# Altium PCB PowerManagement_Base.PcbDoc
Units mm, origin at the board's own origin, x right, y up, seen from the top; angles counter-clockwise.
Board outline 80.38 x 130.25 mm, 2 copper layers (Top Layer, Bottom Layer); 73 components, 72 nets, 280 pads, 42 vias.
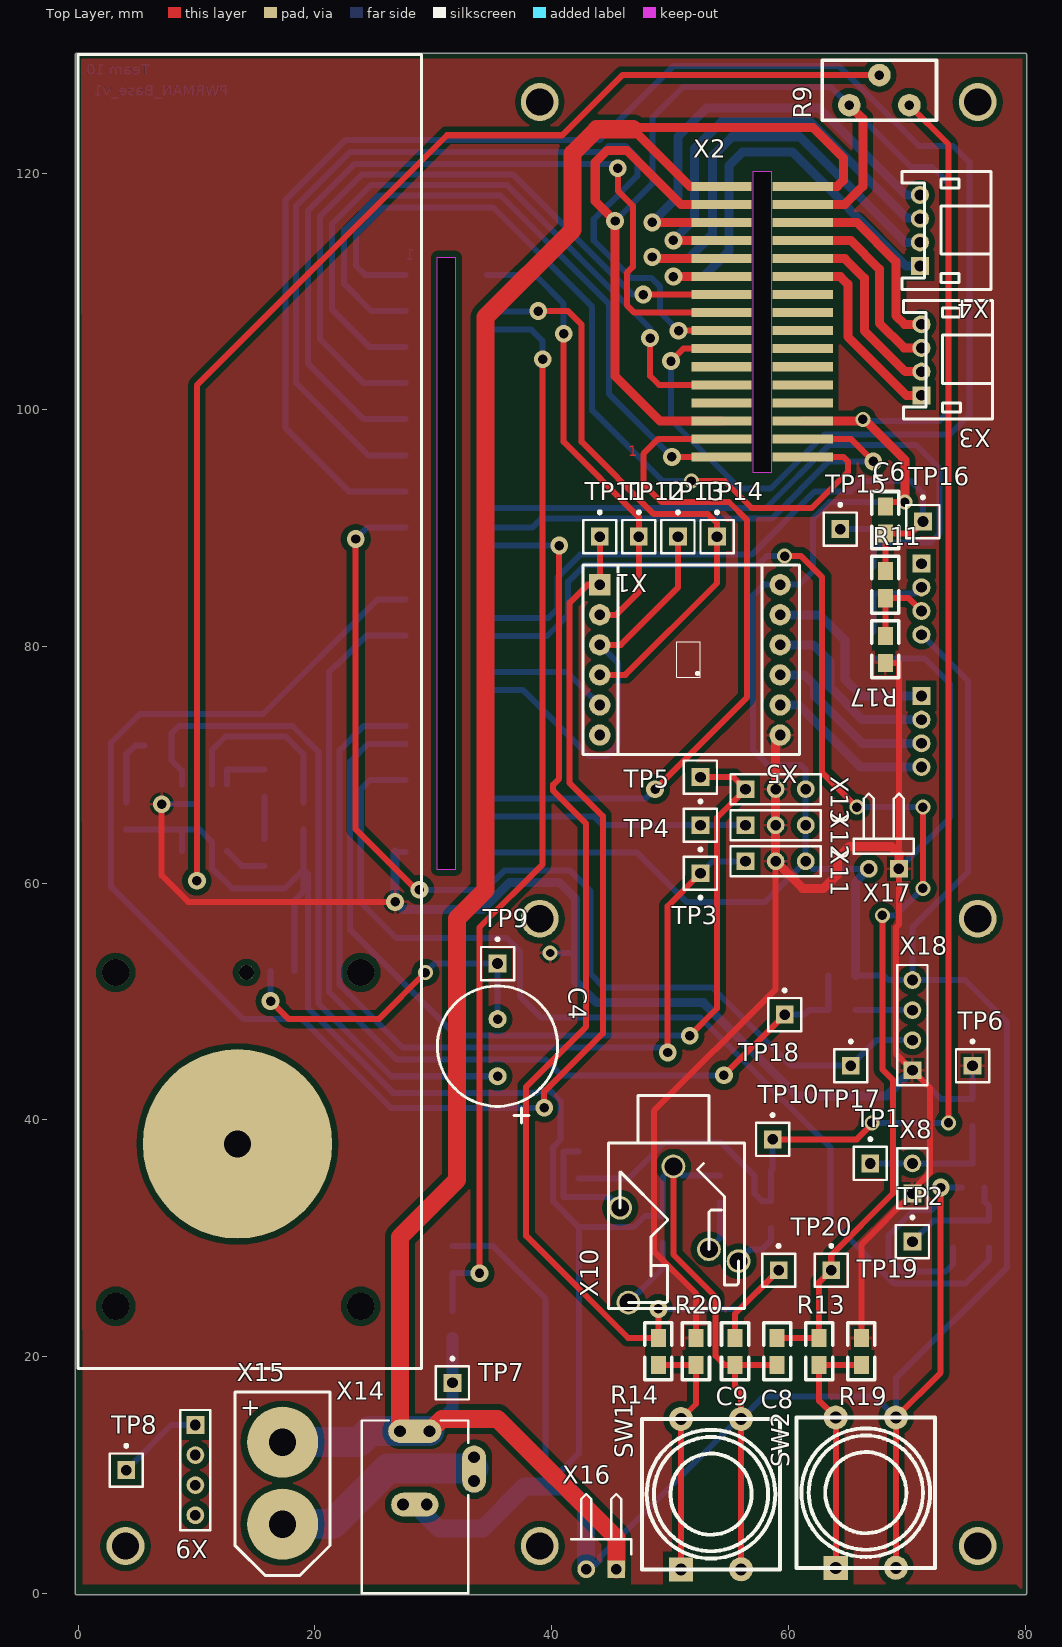
[diagram p0: Top Layer view]
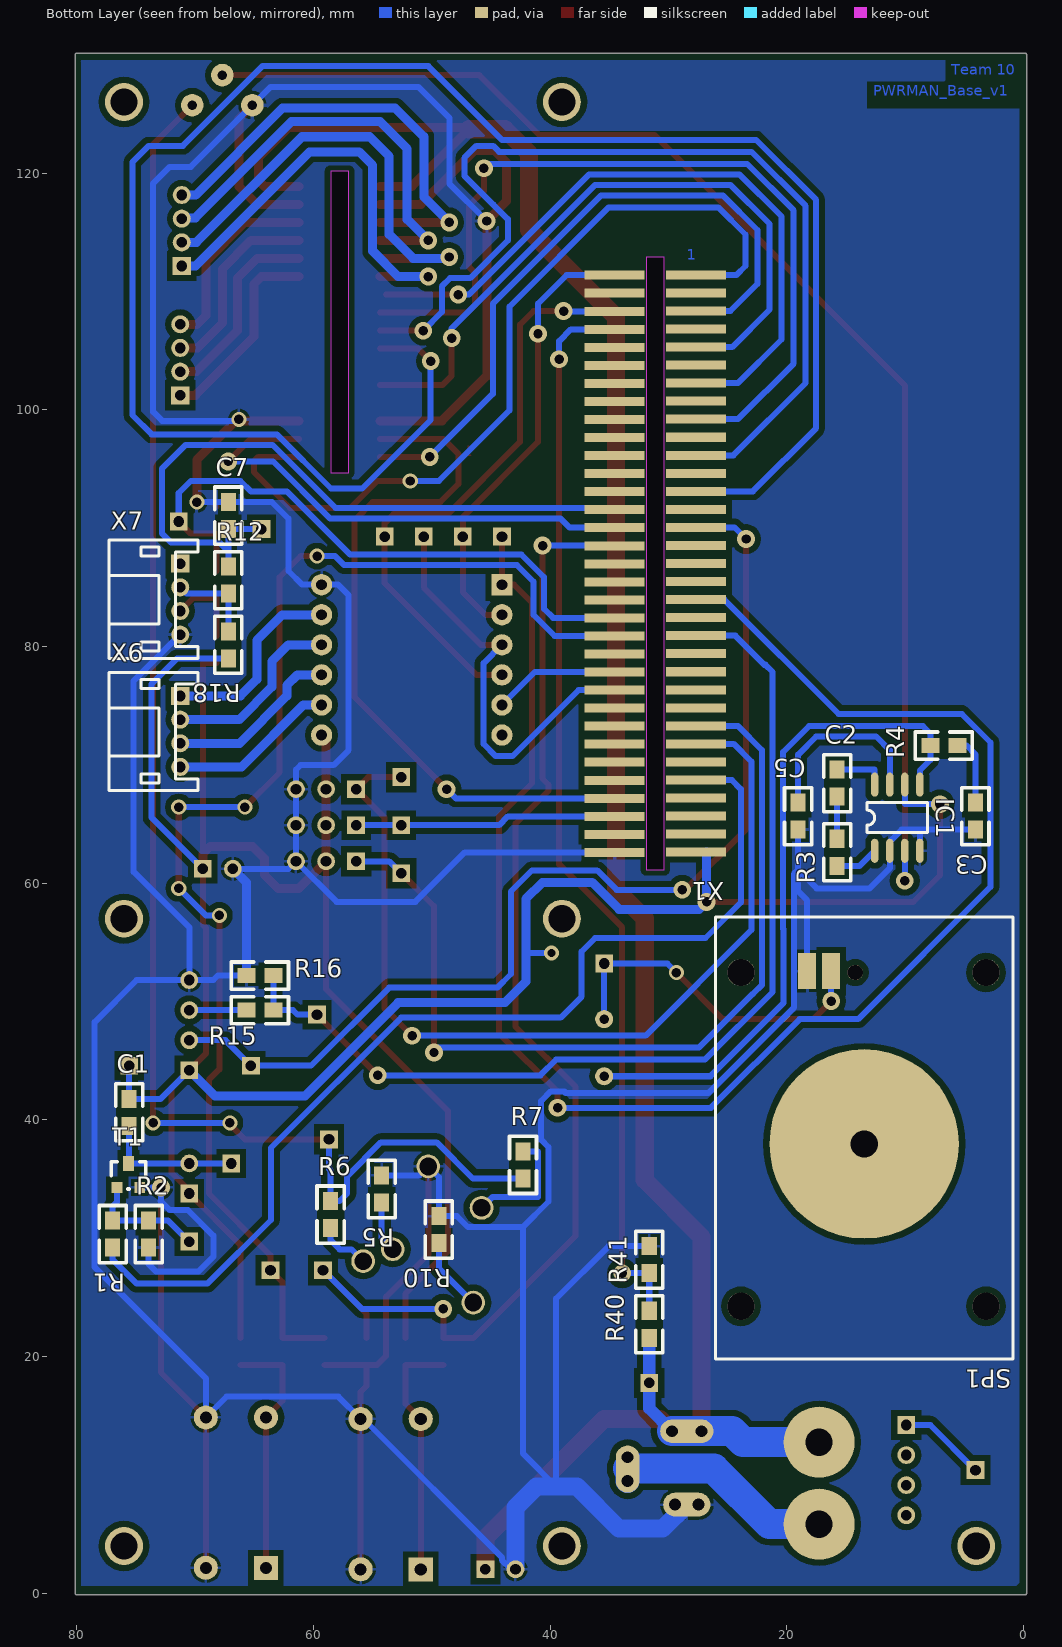
[diagram p1: Bottom Layer view, seen from below]

## Layer stack, top to bottom
Top Solder: solder mask 0.0102, Solder Resist, Dk 3.5
Top Layer: signal copper 0.0356
Dielectric 1: dielectric 0.32, FR-4, Dk 4.8
Bottom Layer: signal copper 0.0356
Bottom Solder: solder mask 0.0102, Solder Resist, Dk 3.5

## Board outline
-0.254,0 ccw(c-0.127,0) -0.064,-0.11 ccw(c0,0) 0,-0.127 80,-0.127 ccw(c80,0) 80.127,0 80.127,130 ccw(c80,130) 80,130.127 0,130.127 ccw(c0,130) -0.064,130.11 ccw(c-0.127,130) -0.254,130
cut-out: 58.547,120.142 58.547,94.678 57.023,94.679 57.023,120.142
cut-out: 30.353,112.903 31.877,112.903 31.877,61.15 30.353,61.151

## Design rules (kind name [scope] priority, off if disabled: settings)
Clearance 2 [All] p1: gap=0.508 except(0.025: Poly-Text; 0.381: Arc-Arc THPad-Fill Arc-Track Arc-Via Via-Fill Arc-SMDPad Fill-Fill THPad-Via Via-Via Arc-Fill Track-Track SMDPad-Via Track-Via Track-SMDPad SMDPad-Fill Arc-THPad Track-THPad SMDPad-SMDPad Track-Fill THPad-THPad SMDPad-THPad)
PolygonConnect [All] p1: connectstyle=Relief reliefconductorwidth=0.254 reliefentries=4 polygonreliefangle="90 Angle" airgapwidth=0.254
RoomDefinition PowerManagement_Base [InComponentClass('PowerManagement_Base')] p1: confinementstyle=ConfineIn formatcopy=TRUE lockcomponents=FALSE outline -1.524,-1.493 81.407,-1.493 81.407,131.191 -1.524,131.191
RoutingVias [All] p1: holewidth=0.8 width=1.5 viastyle="Through Hole" minholewidth=0.8 minwidth=1.27 maxholewidth=1 maxwidth=1.5
SolderMaskExpansion [All] p1: expansion=0.102
UnpouredPolygon [All] p1: allowunpoured=FALSE
Width [All] p1: maxlimit=2.54 minlimit=0.508 preferedwidth=0.508
29 further rules are at their usual default settings.

## Components (designator, comment, footprint, x,y, rotation, side; value= is the part's Value field where it differs from the comment)
C1 "3p3" 0805 75.565,39.497 r90 bottom
C2 "10u" 0805 15.748,67.31 r90 bottom
C3 "56n" 0805 4.064,66.802 r270 bottom
C4 "220u" ELKO 35.433,46.228 r0 top
C5 "10n" 0805 19.05,66.802 r270 bottom
C6 "100n" 0805 68.199,89.535 r90 top
C7 "100n" 0805 67.183,89.916 r90 bottom
C8 "100n" 0805 59.055,21.59 r270 top
C9 "100n" 0805 55.499,21.59 r270 top
IC1 "LM386M" SO-8 12.573,62.738 r90 bottom
R1 "0" 0805 76.962,31.496 r270 bottom
R2 "100k" 0805 73.914,29.21 r90 bottom
R3 "1k2" 0805 15.748,61.468 r90 bottom
R4 "10" 0805 5.588,71.628 r0 bottom
R5 "100k" 0805 54.229,35.306 r270 bottom
R6 "10k" 0805 58.547,30.861 r90 bottom
R7 "10k" 0805 42.291,35.052 r90 bottom
R9 "10k" POT2 67.691,128.27 r180 top
R10 "100k" 0805 49.403,31.877 r270 bottom
R11 "220k" 0805 68.199,84.074 r90 top
R12 "220k" 0805 67.183,84.455 r90 bottom
R13 "100k" 0805 62.611,21.59 r270 top
R14 "100k" 0805 49.022,21.59 r270 top
R15 "15k" 0805 63.373,49.276 r0 bottom
R16 "27k" 0805 65.659,52.197 r180 bottom
R17 "10k" 0805 68.199,80.899 r270 top
R18 "10k" 0805 67.183,81.28 r270 bottom
R19 "10k" 0805 66.167,21.59 r270 top
R20 "10k" 0805 52.197,19.304 r90 top
R40 "33k" 0805 31.623,23.876 r270 bottom
R41 "10k" 0805 31.623,29.337 r270 bottom
SP1 "Speaker" SPEAKER 13.462,37.973 r270 bottom
SW1 "SW_BLUE" TASTER 53.467,8.382 r90 top
SW2 "SW_GREEN" TASTER 66.548,8.509 r90 top
T1 "IRLML0060TRPBF" SOT-23 76.581,34.29 r180 bottom
TP1 "" PIN1 66.929,36.322 r0 top
TP2 "" PIN1 70.485,29.718 r0 top
TP3 "" PIN1 52.578,60.833 r180 top
TP4 "" PIN1 52.578,64.897 r180 top
TP5 "" PIN1 52.578,68.961 r180 top
TP6 "" PIN1 75.565,44.577 r0 top
TP7 "" PIN1 31.623,17.78 r0 top
TP8 "" PIN1 4.064,10.414 r0 top
TP9 "" PIN1 35.433,53.213 r0 top
TP10 "" PIN1 58.674,38.354 r0 top
TP11 "" PIN1 44.069,89.281 r0 top
TP12 "" PIN1 47.371,89.281 r0 top
TP13 "" PIN1 50.673,89.281 r0 top
TP14 "" PIN1 53.975,89.281 r0 top
TP15 "" PIN1 64.389,89.916 r0 top
TP16 "" PIN1 71.374,90.551 r0 top
TP17 "" PIN1 65.278,44.577 r0 top
TP18 "" PIN1 59.69,48.895 r0 top
TP19 "" PIN1 63.627,27.305 r0 top
TP20 "" PIN1 59.182,27.305 r0 top
X1 "PCB_CON_66" PCB_CON_66_JACK 25.019,111.887 r0 bottom
X2 "PCB_CON_32" PCB_CON_32_JACK 51.689,95.504 r0 top
X3 "JST_1x4_2mm" JST_1X4_2MM_HORIZONTAL 71.247,101.219 r180 top
X4 "JST_1x4_2mm" JST_1X4_2MM_HORIZONTAL 71.12,112.141 r180 top
X5 "H_Bridge" H_BRIDGE 51.562,78.867 r180 top
X6 "JST_1x4_2mm" JST_1X4_2MM_HORIZONTAL 71.247,75.819 r180 bottom
X7 "JST_1x4_2mm" JST_1X4_2MM_HORIZONTAL 71.247,86.995 r180 bottom
X8 "CON2" HDR1X2 70.485,33.782 r90 top
X9 "BAT_Balancer" HDR1X4 9.906,14.224 r270 top
X10 "Phone_JACK" "AUDIO_CON 3.5MM" 50.292,36.068 r270 top
X11 "Servo_Greifer_Schliessen" HDR1X3 56.388,61.849 r0 top
X12 "Servo_Greifer_Kippen" HDR1X3 56.388,64.897 r0 top
X13 "Servo_Muldenklappe" HDR1X3 56.388,67.945 r0 top
X14 "DC_SUPPLY" KLD-0202 28.448,0 r90 top
X15 "BAT_SUPPLY" XT60_CON 17.272,9.271 r0 top
X16 "DC/DC IN" HDR1X2H 45.466,2.032 r180 top
X17 "DC/DC OUT" HDR1X2H 69.342,61.214 r180 top
X18 "ULTRA_SONIC" HDR1X4 70.485,44.196 r90 top

## Footprints (in the part's own frame and the unit in brackets; to place one, negate y for a bottom-side part, rotate by r counter-clockwise, add the part's x,y. Pads: shape width x height; smd on the part's side, far side on the other; paste and mask are expansions set on the pad)
0805 [mil]
  rect 60x50 smd: 1(0,0) 2(90,0)
  silkscreen extent -50,-45 140,45
"AUDIO_CON 3.5MM" [mm] "3.5 mm Audio Phone Jack with Disconnect Pins"
  round 2 hole 1.5: 1(0,0) 2(3.5,-4.5) 3(11.5,-3.8) 4(8,5.5) 5(7,3)
  silkscreen extent -6,-5.5 12,6
ELKO [mil] "electrolyt capacitor 5.08mm radial"
  round 60 hole 31.5: 1(0,-100) 2(0,90)
  silkscreen extent -200,-255 200,200
H_BRIDGE [mm] "H_Bridge Shield can be Plugged in"
  rect 1.8x1.8 hole 0.9: 1(7.493,-6.35)
  round 1.8 hole 0.9: 2(7.493,-3.81) 3(7.493,-1.27) 4(7.493,1.27) 5(7.493,3.81) 6(7.493,6.35) 7(-7.747,6.35) 8(-7.747,3.81) 9(-7.747,1.27) 10(-7.747,-1.27) 11(-7.747,-3.81) 12(-7.747,-6.35)
  silkscreen extent -9.4,-8 8.89,8
HDR1X2 [mm] "Connector; Header; 2 Position"
  rect 1.5x1.5 hole 0.9: 1(0,0)
  round 1.5 hole 0.9: 2(2.54,0)
  silkscreen extent -1.27,-1.27 3.81,1.27
HDR1X2H [mm] "Connector; Header; 2 Position; Right Angle"
  rect 1.5x1.5 hole 0.9: 1(0,0)
  round 1.5 hole 0.9: 2(2.54,0)
  silkscreen extent -1.27,-6.35 3.81,-1.27
HDR1X3 [mm] "Connector; Header; 3 Position"
  rect 1.5x1.5 hole 0.9: 1(0,0)
  round 1.5 hole 0.9: 2(2.54,0) 3(5.08,0)
  silkscreen extent -1.27,-1.27 6.35,1.27
HDR1X4 [mm] "Connector; Header; 4 Position"
  rect 1.5x1.5 hole 0.9: 1(0,0)
  round 1.5 hole 0.9: 2(2.54,0) 3(5.08,0) 4(7.62,0)
  silkscreen extent -1.27,-1.27 8.89,1.27
JST_1X4_2MM_HORIZONTAL [mil] "JST Jack Connecter 2mm Grid"
  rect 60x60 hole 35.43: 1(0,0)
  round 60 hole 35.43: 2(0,-78.74) 3(0,-157.48) 4(0,-236.22)
  silkscreen extent -236,-315 59,79
KLD-0202 [mm] "DC Power Jack, 2.5mm, KLD Series, PCB Mount"
  oval 2x4.5 all layers, no hole: 1(13.7,0)
  round 1.5 hole 1: 1A(13.7,-1.25) 1B(13.7,1.25) 2A(7.5,-1) 2B(7.5,1) 3A(9.5,-5) 3B(11.5,-5)
  oval 2x4 all layers, no hole: 2(7.5,0)
  oval 4x2 all layers, no hole: 3(10.5,-5)
  silkscreen extent 0,-4.5 14.6,4.5
PCB_CON_32_JACK [mil] "Another PCB with the plug is going to be plugged in this PCB jack"
  rect 200x30 smd: 1(105,20) 2(105,80) 3(105,140) 4(105,200) 5(105,260) 6(105,320) 7(105,380) 8(105,440) 9(105,500) 10(105,560) 11(105,620) 12(105,680) 13(105,740) 14(105,800) 15(105,860) 16(105,920) 17(375,920) 18(375,860) 19(375,800) 20(375,740) 21(375,680) 22(375,620) 23(375,560) 24(375,500) 25(375,440) 26(375,380) 27(375,320) 28(375,260) 29(375,200) 30(375,140) 31(375,80) 32(375,20)
PCB_CON_66_JACK [mil] "Another PCB with the plug is going to be plugged in this PCB jack"
  rect 200x30 smd: 1(104.5,19.5) 2(104.5,79.5) 3(104.5,139.5) 4(104.5,199.5) 5(104.5,259.5) 6(104.5,319.5) 7(104.5,379.5) 8(104.5,439.5) 9(104.5,499.5) 10(104.5,559.5) 11(104.5,619.5) 12(104.5,679.5) 13(104.5,739.5) 14(104.5,799.5) 15(104.5,859.5) 16(104.5,919.5) 17(104.5,979.5) 18(104.5,1039.5) 19(104.5,1099.5) 20(104.5,1159.5) 21(104.5,1219.5) 22(104.5,1279.5) 23(104.5,1339.5) 24(104.5,1399.5) 25(104.5,1459.5) 26(104.5,1519.5) 27(104.5,1579.5) 28(104.5,1639.5) 29(104.5,1699.5) 30(104.5,1759.5) 31(104.5,1819.5) 32(104.5,1879.5) 33(104.5,1939.5) 34(375.5,1940.5) 35(375.5,1880.5) 36(375.5,1820.5) 37(375.5,1760.5) 38(375.5,1700.5) 39(375.5,1640.5) 40(375.5,1580.5) 41(375.5,1520.5) 42(375.5,1460.5) 43(375.5,1400.5) 44(375.5,1340.5) 45(375.5,1280.5) 46(375.5,1220.5) 47(375.5,1160.5) 48(375.5,1100.5) 49(375.5,1040.5) 50(375.5,980.5) 51(375.5,920.5) 52(375.5,860.5) 53(375.5,800.5) 54(375.5,740.5) 55(375.5,680.5) 56(375.5,620.5) 57(375.5,560.5) 58(375.5,500.5) 59(375.5,440.5) 60(375.5,380.5) 61(375.5,320.5) 62(375.5,260.5) 63(375.5,200.5) 64(375.5,140.5) 65(375,80) 66(375,20)
PIN1 [mm] "Connector; Plug"
  rect 1.5x1.5 hole 0.9: 1(0,0)
  silkscreen extent -1.4,-1.4 1.4,2.17
POT2 [mil]
  round 75 hole 32: 1(-100,100) 2(0,0) 3(100,100)
  silkscreen extent -190,-50 190,150
SO-8 [mil]
  oval 80x24 smd: 1(0,0) 2(0,-50) 3(0,-100) 4(0,-150) 5(220,-150) 6(220,-100) 7(220,-50) 8(220,0)
  silkscreen extent 60,-175 160,25
SOT-23 [mil]
  rect 36x36 smd: 1(0,0) 2(75,0)
  rect 36x50 smd: 3(38,80)
  silkscreen extent -20,-5 95,85
SPEAKER [mm] "Sony Ericson Speaker"
  rect 3.048x1.524 smd: 1(-14.605,-2.794) 2(-14.605,-4.826)
  round 2.3 hole 2.3 unplated: ""(-14.478,-10.414) ""(-14.478,10.287) ""(13.722,-10.414) ""(13.722,10.287)
  round 1.3 hole 1.3 unplated: ""(-14.478,-0.762)
  round 16 hole 2.3 unplated: ""(0,0)
  silkscreen extent -19.18,-12.57 18.16,12.57
TASTER [mil]
  rect 80x80 hole 40: 1(-250,100)
  round 80 hole 40: 1(250,100) 2(-250,-100) 2(250,-100)
  silkscreen extent -250,-230 250,230
XT60_CON [mm] "LiPo Accumulator Connector"
  round 6 hole 2.3: 1(0,3.5) 2(0,-3.429)
  silkscreen extent -4,-7.75 4,7.75

## Part data
C1 C2 C3 C5 C6 C7 C8 C9: library part C?, "Normaler Kondensator"
C4: library part Elko, "Electrolyt Capacitor"
IC1: library part "Audio Amp", "Audio AMP in SO-8 Package"
R1 R2 R3 R4 R5 R6 R7 R10 R11 R12 R13 R14 R15 R16 R17 R18 R19 R20 R40 R41: library part R?, "Normaler Widerstand"
R9: library part R_POT1
SP1: "8 Ohm Speaker"
SW1 SW2: library part SW-PB
T1: library part "MOSFET N"
TP1 TP2 TP3 TP4 TP5 TP6 TP7 TP8 TP9 TP10 TP11 TP12 TP13 TP14 TP15 TP16 TP17 TP18 TP19 TP20: library part Socket
X1 X2: "Connects a PCB with another. This scheme is either jack or plug, depends on footprint"
X3 X4 X6 X7: "JST connector single row 4 pin, 2mm grid"
X5: "H-Bridge Shield"
X9 X18: library part "Header 4", "Header, 4-Pin"
X10: "3.5 mm Phone Jack Stereo with Disconnect information"
X11 X12 X13: library part "Header 3", "Header, 3-Pin"
X14: library part PWR2.5, "Low Voltage Power Supply Connector"
X15: library part XT60_CON, "XT60 LiPo Accumulator Connector"
X16 X17: library part "Header 2H", "Header, 2-Pin, Right Angle"

## Free pads (board coordinates)
  round 3.2 hole 2.3: ""(4,4) ""(39,4) ""(39,57) ""(39,126) ""(76,4) ""(76,57) ""(76,126)

## Via types
v1: diameter 1.5, hole 0.8, Top Layer to Bottom Layer, 30 vias
v2: diameter 1.27, hole 0.8, Top Layer to Bottom Layer, 11 vias
v3: diameter 1.27, hole 0.711, Top Layer to Bottom Layer, 1 vias

## Nets (pads, with @x,y where several pads share a name; then routed paths per layer and width w, separated by ;. In a path a pad name is that pad's centre, name@x,y a point inside that pad or via, vN(x,y) a via of type N, cw(c..) or ccw(c..) an arc to the next point about the centre after c; other vN are vias at no path point)
DIR_LEFT: 
DIR_RIGHT: 
ENABLE: 
GND: C3.2 C5.2 C6.2 C7.2 C8.2 C9.2 IC1.2 IC1.4 R2.1 R5.1 R9.3 R10.1 R16.1 R41.1 SP1.2 SW1.2 SW2.2 T1.2 X1.34 X2.3 X2.15 X2.18 X2.30 X5.12 X7.4 X10.1 X11.3 X12.3 X13.3 X14.2 X14.2A X14.2B X16.2 X17.2 X18.4 | length 605.6
  Top Layer w0.508: X10.1 50.292,28.626 53.848,25.07 53.848,20.066 54.61,19.304 C9.2 ; SW1.2@56.007,2.032 56.007,14.732 56.007,17.018 55.499,17.526 C9.2 ; C8.2 C9.2 ; C6.2 68.58,92.202 v2(69.85,92.202) ; SW2.2@69.088,2.159 69.088,14.859 72.873,18.644 v1(72.873,34.29)
  Top Layer w0.762: X2.3 49.149,99.06 45.339,102.87 45.339,115.919 v1(45.364,115.944) 43.688,117.621 43.688,120.904 44.704,121.92 46.355,121.92 50.927,117.348 X2.15 ; X2.30 v2@66.294,99.06 ; X2.18 64.77,117.348 66.294,118.872 66.294,124.587 R9.3 ; v2@66.548,99.06 69.85,95.758 v2(69.85,92.202)
  Bottom Layer w0.508: C3.2 8.763,64.516 ; IC1.4 8.763,64.516 ; SP1.2 18.288,58.547 19.05,59.309 19.05,61.138 ; C5.2 19.05,61.138 ; X14.2B X14.2@27.915,7.5 ; R41.1 35.052,29.337 39.497,24.892 39.497,9.017 42.308,11.828 42.308,30.933 ; X1.34 47.206,62.598 51.384,58.42 58.039,58.42 X11.3 ; X16.2 43.307,2.032 44.081,2.806 44.081,3.045 SW1.2@55.768,14.732 ; v1(45.364,115.944) 48.514,119.094 48.514,124.663 51.105,127.254 63.627,127.254 R9.3 70.358,120.523 72.136,120.523 73.533,119.126 73.533,99.822 72.771,99.06 66.421,99.06 v2(66.294,99.187) ; R5.1 51.054,35.306 X10.1 49.403,35.179 R10.1 47.879,31.877 46.935,30.933 42.308,30.933 ; SW1.2@56.007,14.732 57.887,16.612 67.335,16.612 69.088,14.859 69.088,18.161 78.486,27.559 78.486,48.26 74.93,51.816 X18.4 ; R16.1 68.072,52.197 68.453,51.816 X18.4 ; X17.2 62.103,61.214 X11.3 ; v2(69.85,92.202) C7.2 63.5,92.202 62.103,90.805 62.103,86.379 60.941,85.217 X5.12 57.912,85.217 57.023,84.328 57.023,71.247 58.293,69.977 61.087,69.977 61.468,69.596 X13.3 X12.3 X11.3 ; X7.4 71.247,81.026 75.184,77.089 75.184,60.96 70.485,56.261 X18.4 ; R2.1 73.914,27.813 73.279,27.178 69.723,27.178 68.453,28.448 68.453,30.226 70.612,32.385 72.136,32.385 72.898,33.147 72.873,33.172 v1(72.873,34.29) T1.2 ; 8.763,64.516 10.295,64.516 11.303,63.508 IC1.2 11.303,61.265 13.005,59.563 17.475,59.563 19.05,61.138 ; 19.05,61.138 19.406,60.782 19.406,49.492 26.607,42.291 38.681,42.291 38.796,42.406 39.944,42.406 40.755,41.595 40.755,38.329 40.132,37.706 40.132,33.109 42.308,30.933
  Bottom Layer w0.762: R16.1 65.659,60.071 X17.2
  Bottom Layer w1.524: X14.2 30.487,5.461 34.163,5.461 37.719,9.017 39.497,9.017 41.148,9.017 42.926,7.239 X16.2@42.926,2.286
MS1: 
MS2: 
MS3: 
NetC1_1: C1.1 T1.3 TP1.1 X8.2 | length 11.9
  Bottom Layer w0.508: TP1.1 X8.2 T1.3@75.565,36.322 ; C1.1 T1.3@75.565,36.322 ; T1.3 T1.3@75.565,36.322
NetC2_1: C2.1 R3.2 | length 3.6
  Bottom Layer w0.508: R3.2 C2.1
NetC2_2: C2.2 IC1.8 | length 4.4
  Bottom Layer w0.508: IC1.8 12.573,69.596 C2.2
NetC3_1: C3.1 R4.1 | length 5.9
  Bottom Layer w0.508: C3.1 4.064,70.879 4.813,71.628 R4.1
NetC4_1: C4.1 IC1.5 R4.2 | length 57.2
  Bottom Layer w0.508: IC1.5 8.763,69.52 7.874,70.409 R4.2 7.874,72.644 8.509,73.279 18.11,73.279 20.32,71.069 20.32,56.134 20.295,56.109 20.295,49.86 26.467,43.688 C4.1
NetC4_2: C4.2 SP1.1 TP9.1 | length 29
  Top Layer w0.508: v1(16.256,50.038) 17.78,48.514 25.4,48.514 v2(29.337,52.451)
  Bottom Layer w0.508: v1(16.256,50.038) SP1.1 ; v2(29.337,52.451) 30.099,53.213 TP9.1 C4.2
NetC5_1: C5.1 IC1.7 | length 15.8
  Bottom Layer w0.508: IC1.7 11.303,71.247 12.446,72.39 17.526,72.39 19.05,70.866 C5.1
NetC6_1: C6.1 R11.2 TP16.1 X1.47 | length 52.8
  Top Layer w0.508: R11.2 C6.1 70.358,89.535 TP16.1
  Bottom Layer w0.508: X1.47 39.738,82.41 40.513,83.185 40.513,85.852 42.418,87.757 56.896,87.757 62.242,93.103 65.29,93.103 66.167,93.98 70.358,93.98 71.374,92.964 TP16.1
NetC7_1: C7.1 R12.2 TP15.1 X1.53 | length 59
  Bottom Layer w0.508: X1.53 34.696,91.694 58.115,91.694 63.449,97.028 70.79,97.028 72.771,95.047 72.771,89.535 72.034,88.798 67.945,88.798 67.183,88.036 ; TP15.1 C7.1 67.183,88.036 ; R12.2 67.183,88.036
NetC8_1: C8.1 R13.1 TP19.1 X1.46 | length 113.1
  Top Layer w0.508: C8.1 R13.1 62.611,26.289 TP19.1 63.627,28.575 68.834,33.782 68.834,43.383 67.945,44.272 v2(67.945,57.277) ; v2(59.69,87.63) 61.087,87.63 62.865,85.852 62.865,69.342 v2(65.786,66.421) ; v2(71.374,59.563) v2(71.374,66.421)
  Bottom Layer w0.508: X1.46 39.611,80.886 41.402,82.677 41.402,85.471 42.799,86.868 57.404,86.868 58.166,87.63 v2(59.69,87.63) ; v2(65.786,66.421) v2(71.374,66.421) ; v2(67.945,57.277) 69.088,57.277 v2(71.374,59.563)
NetC9_1: C9.1 R14.1 TP20.1 X1.51 | length 103.8
  Top Layer w0.508: v1(40.64,88.519) 40.64,68.834 40.132,68.326 40.132,67.818 42.926,65.024 42.926,47.879 37.846,42.799 37.846,30.201 46.457,21.59 R14.1 v1(49.022,24.028) ; C9.1 55.499,23.622 TP20.1
  Bottom Layer w0.508: X1.51 34.569,88.519 v1(40.64,88.519) ; v1(49.022,24.028) 55.905,24.028 TP20.1
NetIC1_1: IC1.1 R3.1 | length 3.7
  Bottom Layer w0.508: IC1.1 13.843,61.468 R3.1
NetIC1_3: IC1.3 R9.2 | length 113.1
  Top Layer w0.508: v1(10.033,60.198) 10.033,102.057 31.166,123.19 40.894,123.19 45.974,128.27 67.31,128.27 R9.2@67.691,127.889
  Bottom Layer w0.508: v1(10.033,60.198) IC1.3
NetR1_1: R1.1 R2.2 T1.1 TP2.1 | length 10.2
  Bottom Layer w0.508: TP2.1 72.263,31.496 R2.2 R1.1 76.962,32.69 76.581,33.071 T1.1
NetR1_2: R1.2 X1.29 | length 87.8
  Bottom Layer w0.508: X1.29 24.651,68.72 23.876,67.945 23.876,58.369 26.873,55.372 36.195,55.372 37.338,54.229 37.338,50.419 39.116,48.641 52.578,48.641 63.576,37.643 63.576,31.547 68.961,26.162 74.93,26.162 76.962,28.194 R1.2
NetR5_2: R5.2 X10.5 | length 4.3
  Bottom Layer w0.508: X10.5 54.229,30.005 R5.2
NetR6_1: R6.1 X10.4 | length 4.5
  Bottom Layer w0.508: X10.4 56.782,29.058 57.785,29.058 58.547,29.82 R6.1
NetR6_2: R6.2 R7.1 R9.1 TP10.1 | length 128.6
  Top Layer w0.508: TP10.1 65.786,38.354 67.056,39.624 v2(67.056,39.751) ; R9.1 73.533,122.428 v2(73.533,39.751)
  Bottom Layer w0.508: R7.1 46.533,35.052 49.581,38.1 54.305,38.1 57.15,35.255 57.15,33.782 57.785,33.147 R6.2 58.547,35.738 58.674,35.865 TP10.1 ; v2(67.056,39.751) v2(73.533,39.751)
NetR7_2: R7.2 X10.2 | length 10.3
  Bottom Layer w0.508: R7.2 41.021,37.338 41.021,33.477 44.883,33.477 X10.2
NetR10_2: R10.2 X10.3 | length 6.2
  Bottom Layer w0.508: X10.3 49.403,27.479 R10.2
NetR11_1: R11.1 R17.1 X7.3 | length 6.7
  Top Layer w0.508: R17.1 R11.1 70.168,84.074 X7.3
NetR12_1: R12.1 R18.1 X7.2 | length 7.5
  Bottom Layer w0.508: R18.1 R12.1 70.707,84.455 X7.2
NetR13_2: R13.2 R19.2 SW2.1 | length 21.3
  Top Layer w0.508: SW2.1@64.008,2.159 64.008,14.859 62.611,16.256 R13.2 R19.2
NetR14_2: R14.2 R20.1 SW1.1 | length 21
  Top Layer w0.508: R14.2 R20.1 52.197,16.002 50.927,14.732 SW1.1@50.927,2.032
NetR15_1: R15.1 R16.2 TP18.1 X1.21 | length 85.2
  Top Layer w0.508: v1(54.559,43.764) TP18.1
  Bottom Layer w0.508: X1.21 24.346,80.912 21.819,78.384 21.819,78.461 21.209,77.851 21.209,55.766 21.202,55.759 21.202,50.807 26.924,45.085 39.497,45.085 40.818,43.764 v1(54.559,43.764) ; TP18.1 61.341,48.895 61.722,49.276 R15.1 R16.2
NetR15_2: R15.2 X18.3 | length 4.8
  Bottom Layer w0.508: R15.2 X18.3
NetR40_1: R40.1 R41.2 X1.63 | length 91.5
  Top Layer w0.508: v1(33.909,27.051) 33.909,56.261 39.243,61.595 v1(39.243,104.267)
  Bottom Layer w0.508: R40.1 R41.2 v1(33.909,27.051) ; X1.63 38.24,106.794 39.243,105.791 v1(39.243,104.267)
NetTP3_1: TP3.1 X1.26 X11.1 | length 76.9
  Top Layer w0.508: v1(49.809,45.695) 49.809,58.064 TP3.1
  Bottom Layer w0.508: X1.26 24.143,73.292 22.098,71.247 22.098,53.206 22.091,53.199 22.091,51.417 22.86,50.648 22.885,50.648 27.432,46.101 49.403,46.101 v1(49.809,45.695) ; TP3.1 53.594,61.849 X11.1
NetTP4_1: TP4.1 X1.36 X12.1 | length 22.1
  Bottom Layer w0.508: X1.36 43.561,65.646 44.31,64.897 TP4.1 X12.1
NetTP5_1: TP5.1 X1.27 X13.1 | length 78.9
  Top Layer w0.508: v1(51.664,47.117) 53.975,49.428 53.975,65.532 X13.1 55.372,68.961 TP5.1
  Bottom Layer w0.508: X1.27 24.485,71.768 22.987,70.27 22.987,56.058 31.928,47.117 v1(51.664,47.117)
NetTP8_1: TP8.1 X9.1 | length 7.4
  Bottom Layer w0.508: TP8.1 7.874,14.224 X9.1
NetTP11_1: TP11.1 X1.19 X5.1 | length 139.5
  Top Layer w0.508: v1(39.37,41.021) 39.37,42.367 44.323,47.32 44.323,65.659 41.529,68.453 41.529,83.693 43.053,85.217 X5.1 TP11.1
  Bottom Layer w0.508: X1.19 25.286,83.96 15.621,74.295 5.207,74.295 2.794,71.882 2.794,59.69 13.97,48.514 18.923,48.514 26.416,41.021 v1(39.37,41.021)
NetTP12_1: TP12.1 X1.66 X5.2 | length 38.6
  Top Layer w0.508: v1(41.021,106.426) 41.021,97.282 47.371,90.932 TP12.1 47.371,84.582 45.466,82.677 X5.2
  Bottom Layer w0.508: X1.66 38.608,111.379 41.021,108.966 v1(41.021,106.426)
NetTP13_1: TP13.1 X1.43 X5.3 | length 35.7
  Top Layer w0.508: X5.3 45.847,80.137 50.673,84.963 TP13.1
  Bottom Layer w0.508: X1.43 37.598,76.314 43.174,70.739 44.602,70.739 45.618,71.755 45.618,78.588 X5.3
NetTP14_1: TP14.1 X1.64 X5.4 | length 50.8
  Top Layer w0.508: v1(38.862,108.331) 41.402,108.331 42.545,107.188 42.545,97.282 48.641,91.186 53.213,91.186 53.975,90.424 TP14.1 53.975,85.344 46.228,77.597 X5.4
  Bottom Layer w0.508: X1.64 38.849,108.318 v1(38.862,108.331)
NetTP17_1: TP17.1 X1.15 X18.2 | length 90.8
  Top Layer w0.508: v1(23.444,89.078) 23.444,64.567 28.575,59.436 v1(28.829,59.436)
  Bottom Layer w0.508: v1(23.444,89.078) 24.422,90.056 X1.15 ; v1(28.829,59.436) 34.377,59.436 36.028,61.087 41.529,61.087 43.307,59.309 43.307,52.324 44.45,51.181 53.594,51.181 60.198,44.577 TP17.1 67.437,46.736 X18.2
NetX1_1: X1.1 X2.32 | length 71.4
  Top Layer w0.508: v2(51.816,93.98) 54.61,93.98 56.896,91.694 61.976,91.694 65.024,94.742 65.024,95.631 64.643,96.012 X2.32
  Bottom Layer w0.508: X1.1 24.244,111.392 23.495,112.141 23.495,114.808 25.781,117.094 35.052,117.094 43.434,108.712 43.434,99.949 49.403,93.98 v2(51.816,93.98)
NetX1_3: X1.3 X2.1 | length 57.4
  Top Layer w0.508: v1(50.165,96.012) X2.1
  Bottom Layer w0.508: X1.3 24.765,108.344 22.479,110.63 22.479,115.189 25.4,118.11 35.687,118.11 44.831,108.966 44.831,101.346 v1(50.165,96.012)
NetX1_5: X1.5 X2.5 | length 58.4
  Top Layer w0.508: v1(48.316,106.059) 48.316,102.87 49.078,102.108 X2.5
  Bottom Layer w0.508: X1.5 24.625,105.296 21.463,108.458 21.463,115.697 24.765,118.999 36.195,118.999 48.316,106.878 v1(48.316,106.059)
NetX1_7: X1.7 X2.10 | length 58.2
  Top Layer w0.508: v1(47.752,109.728) X2.10@53.848,109.728
  Bottom Layer w0.508: X1.7 24.13,102.248 20.447,105.931 20.447,116.332 24.003,119.888 36.703,119.888 46.863,109.728 v1(47.752,109.728)
NetX1_9: X1.9 X2.9 | length 72
  Top Layer w0.508: v1(45.593,120.396) 45.593,118.491 46.863,117.221 46.863,112.066 46.355,111.558 46.355,108.839 46.99,108.204 X2.9
  Bottom Layer w0.508: X1.9 24.13,99.2 19.431,103.899 19.431,116.84 23.368,120.777 45.72,120.777 45.593,120.65 v1(45.593,120.396)
NetX1_11: X1.11 X2.8 | length 81.8
  Top Layer w0.508: v1(50.724,106.68) X2.8
  Bottom Layer w0.508: X1.11 24.524,96.152 18.415,102.26 18.415,117.221 22.987,121.793 44.31,121.793 44.818,122.301 46.228,122.301 47.244,121.285 47.244,119.761 44.812,117.329 44.791,117.329 43.561,116.1 43.561,114.3 46.748,111.113 48.453,111.113 49.149,110.417 49.149,108.255 v1(50.724,106.68)
NetX1_13: X1.13 X2.7 | length 158.7
  Top Layer w0.508: v1(50.089,104.115) 51.13,105.156 X2.7
  Bottom Layer w0.508: X1.13 22.873,93.104 17.526,98.45 17.526,117.729 22.606,122.809 44.069,122.809 50.292,129.032 64.303,129.032 71.034,122.301 73.914,122.301 75.299,120.916 75.299,99.556 73.66,97.917 63.081,97.917 58.509,93.345 55.88,93.345 50.089,99.136 v1(50.089,104.115)
NetX1_37: X1.37 X2.2 | length 60.2
  Top Layer w0.508: v1(48.743,67.945) 56.515,75.717 56.515,90.678 54.991,92.202 49.276,92.202 47.752,93.726 47.752,96.266 49.022,97.536 X2.2
  Bottom Layer w0.508: X1.37 47.968,67.17 v1(48.743,67.945)
NetX1_44: X1.44 X5.5 | length 10.7
  Bottom Layer w0.508: X1.44 41.288,77.838 X5.5
NetX1_52: X1.52 X2.31 | length 41.7
  Top Layer w0.508: X2.31 65.278,97.536 v1(67.183,95.631)
  Bottom Layer w0.508: X1.52 34.569,90.043 38.354,90.043 39.116,90.805 58.585,90.805 63.411,95.631 v1(67.183,95.631)
NetX2_6: X2.6
NetX2_11: X2.11 X4.1 | length 37.5
  Top Layer w0.762: v1(50.292,111.252) X2.11
  Bottom Layer w0.762: v1(50.292,111.252) 52.832,111.252 54.991,113.411 54.991,120.65 56.134,121.793 60.325,121.793 69.977,112.141 X4.1
NetX2_12: X2.12 X4.2 | length 40.4
  Top Layer w0.762: v1(48.514,112.903) 48.641,112.776 X2.12
  Bottom Layer w0.762: v1(48.514,112.903) 48.629,112.788 51.574,112.788 53.594,114.808 53.594,121.412 55.245,123.063 60.96,123.063 69.882,114.141 X4.2
NetX2_13: X2.13 X4.3 | length 36
  Top Layer w0.762: v1(50.292,114.3) X2.13
  Bottom Layer w0.762: v1(50.292,114.3) 52.07,116.078 52.07,122.047 54.356,124.333 61.849,124.333 69.977,116.205 71.12,116.205 X4.3
NetX2_14: X2.14 X4.4 | length 38.5
  Top Layer w0.762: v1(48.514,115.824) X2.14
  Bottom Layer w0.762: v1(48.514,115.824) 50.673,117.983 50.673,123.063 53.086,125.476 62.611,125.476 69.946,118.141 X4.4
NetX2_19: X2.19 X3.4 | length 16.3
  Top Layer w0.762: X2.19 65.786,115.824 69.088,112.522 69.088,107.95 69.819,107.219 X3.4
NetX2_20: X2.20 X3.3 | length 16.5
  Top Layer w0.762: X2.20 65.278,114.3 67.691,111.887 67.691,107.315 69.787,105.219 X3.3
NetX2_21: X2.21 X3.2 | length 16.6
  Top Layer w0.762: X2.21 64.77,112.776 66.421,111.125 66.421,106.68 69.882,103.219 X3.2
NetX2_22: X2.22 X3.1 | length 16.8
  Top Layer w0.762: X2.22 64.389,111.252 65.024,110.617 65.024,106.172 69.977,101.219 X3.1
NetX5_8: X5.8 X6.4 | length 14.1
  Bottom Layer w0.762: X5.8 60.833,75.057 66.071,69.819 X6.4
NetX5_9: X5.9 X6.3 | length 14.9
  Bottom Layer w0.762: X5.9 61.341,77.597 62.23,76.708 62.23,75.819 66.23,71.819 X6.3
NetX5_10: X5.10 X6.2 | length 15.8
  Bottom Layer w0.762: X5.10 62.103,80.137 63.5,78.74 63.5,76.581 66.262,73.819 X6.2
NetX5_11: X5.11 X6.1 | length 16.7
  Bottom Layer w0.762: X5.11 62.611,82.677 64.77,80.518 64.77,77.216 66.167,75.819 X6.1
NetX14_3: X14.3 X14.3A X14.3B X15.2 | length 20.1
  Top Layer w0.508: X14.3 X14.3B
  Bottom Layer w2.032: X14.3A X14.3
  Bottom Layer w2.54: X15.2 21.463,5.842 26.162,10.541 X14.3@33.401,10.541
SLEEP: 
STEP_LEFT: 
STEP_RIGHT: 
VCC_5V: C1.2 IC1.6 R17.2 R18.2 R19.1 R20.2 TP6.1 X1.33 X5.7 X8.1 X11.2 X12.2 X13.2 X17.1 X18.1 | length 262.2
  Top Layer w0.508: v1(7.061,66.675) 7.061,60.655 9.296,58.42 v1(26.78,58.42) ; R20.2 52.197,25.349 48.641,28.905 48.641,40.767 58.928,51.054 X11.2 ; R19.1 66.167,29.464 X8.1 70.485,34.036 71.984,35.535 71.984,42.697 X18.1 69.088,45.593 69.088,56.236 69.342,56.49 X17.1 ; R17.2 69.342,78.613 69.342,62.484
  Top Layer w0.762: X5.7 58.928,72.136 X13.2 X12.2 X11.2 61.214,59.563 62.992,59.563 64.135,60.706 64.135,62.103 65.151,63.119 68.707,63.119 69.342,62.484 X17.1
  Bottom Layer w0.508: v1(7.061,66.675) 10.033,66.675 IC1.6 ; X1.33@26.78,62.624 X1.33 ; v3(39.878,54.102) 42.037,54.102 ; R18.2 71.501,78.994 73.66,76.835 73.66,65.532 X17.1 ; X18.1 72.898,41.783 C1.2 TP6.1
  Bottom Layer w0.762: X1.33@26.78,62.624 v1(26.78,58.42) 27.415,57.785 34.163,57.785 36.449,60.071 40.64,60.071 42.037,58.674 42.037,54.102 42.037,51.689 43.815,49.911 52.832,49.911 60.706,42.037 68.326,42.037 X18.1
VCC_BAT: R40.2 TP7.1 X2.16 X2.17 X14.1 X14.1A X14.1B X15.1 X16.1 | length 198.4
  Top Layer w0.508: 46.863,123.698 46.99,123.825
  Top Layer w0.762: 46.863,123.698 51.689,118.872 X2.16 ; 46.99,123.825 62.103,123.825 64.643,121.285 64.643,119.38 64.135,118.872 X2.17
  Top Layer w1.524: X14.1B 27.198,30.119 32.004,34.925 32.004,57.023 34.417,59.436 34.417,107.823 41.783,115.189 41.783,121.666 43.815,123.698 46.863,123.698 ; X14.1A 30.73,14.732 35.433,14.732 45.466,4.699 X16.1
  Bottom Layer w1.016: X14.1A 31.623,15.625 TP7.1 R40.2
  Bottom Layer w2.54: X15.1 23.693,12.771 24.622,13.7 X14.1B X14.1 X14.1A
pads on no net: SP1. X1.2 X1.4 X1.6 X1.8 X1.10 X1.12 X1.14 X1.16 X1.17 X1.18 X1.20 X1.22 X1.23 X1.24 X1.25 X1.28 X1.30 X1.31 X1.32 X1.35 X1.38 X1.39 X1.40 X1.41 X1.42 X1.45 X1.48 X1.49 X1.50 X1.54 X1.55 X1.56 X1.57 X1.58 X1.59 X1.60 X1.61 X1.62 X1.65 X2.4 X2.23 X2.24 X2.25 X2.26 X2.27 X2.28 X2.29 X5.6 X7.1 X9.2 X9.3 X9.4

## Polygon pours and split planes (outlines as drawn)
VCC_5V on Top Layer "Top_Layer_5V" (solid, remove dead copper, pour order 4): 0.254,129.667 79.756,129.667 79.756,0.254 79.248,0.762 0.381,0.762
GND on Bottom Layer "Bottom_Layer-GND" (solid, remove dead copper, pour order 6): 0.381,129.54 79.756,129.54 79.629,129.413 79.629,0.635 0.635,0.635 0.381,0.889

## Other copper
Top Layer:
  text "1" at 46.482,95.758 h1.52
Bottom Layer:
  text "Team 10" at 6.096,128.016 h1.52
  text "PWRMAN_Base_v1" at 12.7,126.238 h1.52
  text "1" at 28.448,112.395 h1.52

## Silkscreen, mask and mechanical layers (free items; w line width, h text height)
Top Overlay:
  lines w0.254: 0,19 0,130 29,130 29,19 0,19
Mechanical 1:
  lines w0.254: -0.127,0 -0.127,130 ; 0,0 80,0 80,130 0,130

## Text inside footprints (layer, text, board x,y; h text height)
X5: Top Overlay "X1" at 48.133,86.106 h1.52 r180
X15: Top Overlay "+" at 13.716,14.986 h1.52